# EAGLE board Orbiter_ENCODER_V4_0 (EAGLE 9.0.1)
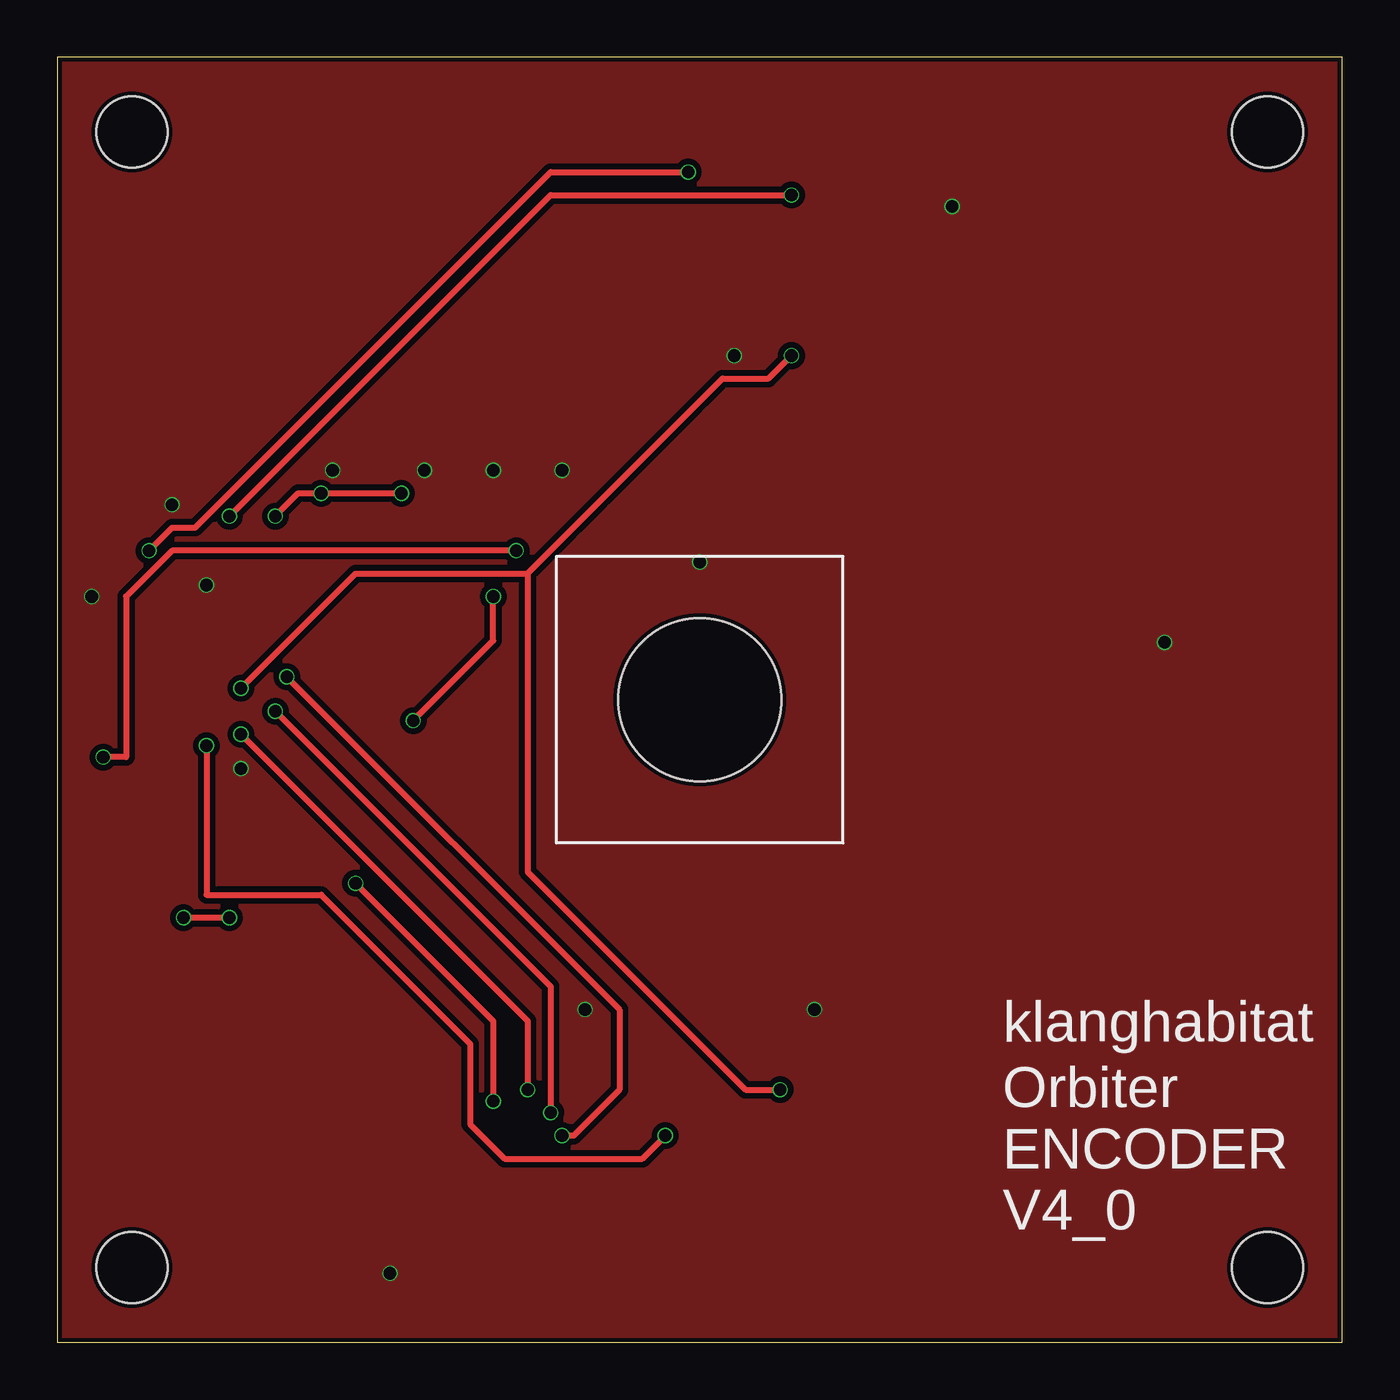
[diagram p0: board, top side]
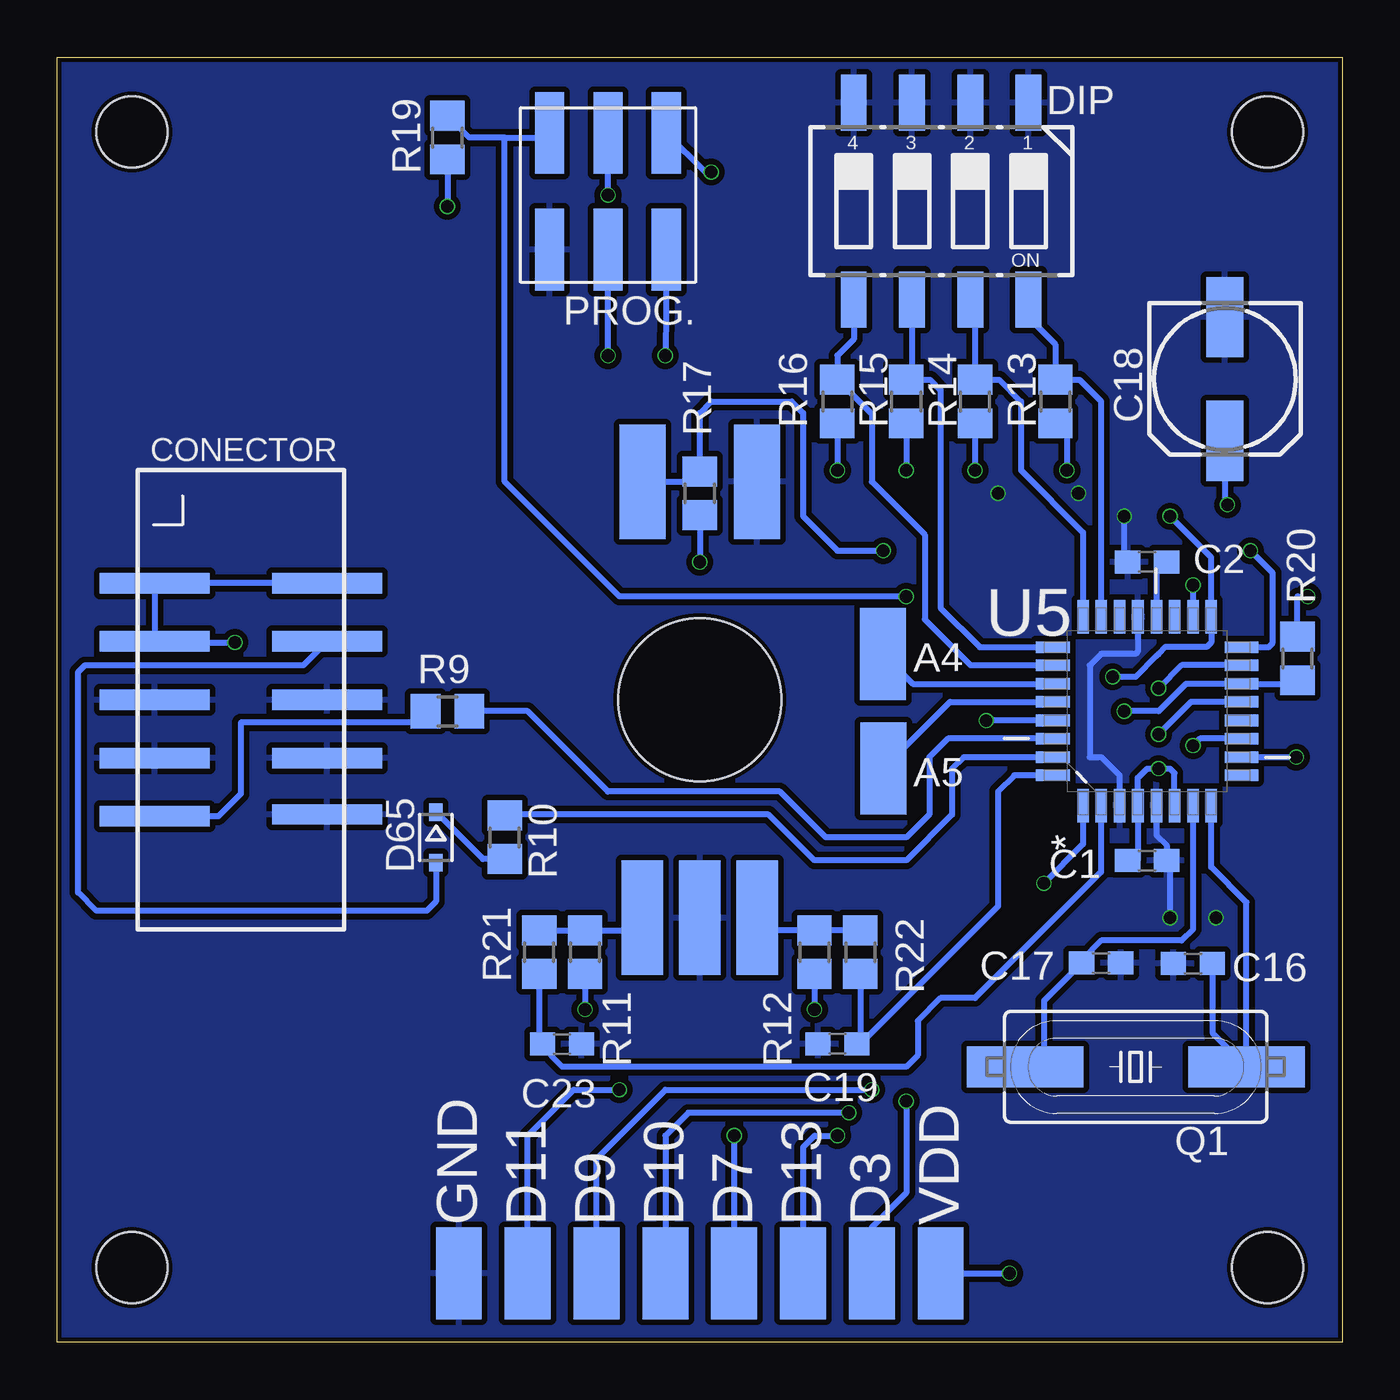
[diagram p1: board, bottom side, seen from below]

Size 56 x 56 mm. Coordinates in mm from the lower left corner, seen from the top.
Outline: 0,0 56,0 56,56 0,56 0,0
Copper layers (1*16): Top 0.035mm / dielectric 1.5mm / Bottom 0.035mm
Design rules "aisler_go_2layer *": minimum track width 0.1mm, minimum drill 0.2mm, track to track 0.25mm, track to pad 0.2mm, pad to pad 0.1mm, via to via 0.1mm, smd to smd 0.1mm, copper to edge 0.2mm, drill to drill 0.21mm, minimum pad ring 0.25mm, minimum via ring 0.05mm, stop-mask expansion 0.01mm, vias tented up to drill 0mil, thermal gap 10mil
Holes 3.1 mm at 3.25,3.25 52.75,52.75 52.75,3.25 3.25,52.75

## Footprints (pad centres in the part's own frame; a part is rotated, then mirrored left to right if it is on the bottom)
OVAL_PAD = smd 2 x 4: P$1 0,0
C0603 = smd 1.1 x 1: 1 -0.85,0; 2 0.85,0
153CLV-0605 = smd 3.5 x 1.6: + 2.7,0; - -2.7,0
87832-10 = smd 0.89 x 4.8: 1 -5.08,-3.759; 2 -5.08,3.757; 3 -2.54,-3.759; 4 -2.54,3.757; 5 0,-3.759; 6 0,3.757; 7 2.54,-3.759; 8 2.54,3.757; 9 5.08,-3.759; 10 5,3.757
SOD323-R = smd 0.762 x 0.6: A 1.1,0; C -1.1,0
CTS-219-04 = smd 1.13 x 2.44: 1 -3.81,-4.3; 2 -1.27,-4.3; 3 1.27,-4.3; 4 3.81,-4.3; 5 3.81,4.3; 6 1.27,4.3; 7 -1.27,4.3; 8 -3.81,4.3
BOURNS_ENCODER_SMD = smd 2 x 5 bottom: S1 -2.5,9.5; S2 2.5,9.5 | smd 1.8 x 5 bottom: TA 2.5,-9.5; TB -2.5,-9.5; VDC 0,-9.5 | hole 7.1: 0,0
6PIN_HEADER_SMD_OPEN = smd 1.27 x 3.56: 1 -2.54,-2.7; 2 -2.54,2.38; 3 0,-2.7; 4 0,2.38; 5 2.54,-2.7; 6 2.54,2.38
SM49 = smd 5.08 x 1.778: 1 -4.826,0; 2 4.826,0
R0805 = smd 1.3 x 1.5: 1 -0.95,0; 2 0.95,0
QFP80P900X900X120-32N = smd 1.473 x 0.508: 1 -4.115,2.794; 2 -4.115,2.007; 3 -4.115,1.194; 4 -4.115,0.406; 5 -4.115,-0.406; 6 -4.115,-1.194; 7 -4.115,-2.007; 8 -4.115,-2.794; 17 4.115,-2.794; 18 4.115,-2.007; 19 4.115,-1.194; 20 4.115,-0.406; 21 4.115,0.406; 22 4.115,1.194; 23 4.115,2.007; 24 4.115,2.794 | smd 0.508 x 1.473: 9 -2.794,-4.115; 10 -2.007,-4.115; 11 -1.194,-4.115; 12 -0.406,-4.115; 13 0.406,-4.115; 14 1.194,-4.115; 15 2.007,-4.115; 16 2.794,-4.115; 25 2.794,4.115; 26 2.007,4.115; 27 1.194,4.115; 28 0.406,4.115; 29 -0.406,4.115; 30 -1.194,4.115; 31 -2.007,4.115; 32 -2.794,4.115

## Placement (x,y rotation side)
A4  TP  [OVAL_PAD]  20.02,30 180 bottom
A5  TP  [OVAL_PAD]  20,25 180 bottom
C1  1uF  [C0603]  8.5,21 180 bottom
C2  100nF  [C0603]  8.5,34.01 0 bottom
C16  22p  [C0603]  6.5,16.5 180 bottom
C17  22p  [C0603]  10.5,16.53 180 bottom
C18  4,7uF/16V  [153CLV-0605]  5.11,41.98 270 bottom
C19  10nF  [C0603]  22,13 0 bottom
C23  10nF  [C0603]  34,13 180 bottom
CONECTOR  10PIN_HEADER_SMD  [87832-10]  48,28 270 bottom
D65  4148  [SOD323-R]  39.5,22 270 bottom
DIP  4PIN_DIP  [CTS-219-04]  17.48,49.73 180 bottom
ENC.  BOURNS_ENCODER  [BOURNS_ENCODER_SMD]  28,28 0 top
PROG.  6PIN_HEADER_SMD_OPEN  [6PIN_HEADER_SMD_OPEN]  32,50 180 bottom
Q1  16MHZ  [SM49]  9,12 0 bottom
R9  1k  [R0805]  38.99,27.49 180 bottom
R10  1k  [R0805]  36.5,22 270 bottom
R11  10k  [R0805]  33,17 90 bottom
R12  10k  [R0805]  23,17 90 bottom
R13  10k  [R0805]  12.5,41 90 bottom
R14  10k  [R0805]  16,41 90 bottom
R15  10k  [R0805]  19,41 90 bottom
R16  10k  [R0805]  22,41 90 bottom
R17  10k  [R0805]  28,37 90 bottom
R19  10k  [R0805]  39,52.5 90 bottom
R20  10k  [R0805]  1.95,29.8 270 bottom
R21  10k  [R0805]  35,17 270 bottom
R22  10k  [R0805]  21,17 270 bottom
U5  ATMEGA328  [QFP80P900X900X120-32N]  8.5,27.5 90 bottom
U$1  TP  [OVAL_PAD]  17.5,3 0 bottom
U$2  TP  [OVAL_PAD]  38.5,3 0 bottom
U$3  TP  [OVAL_PAD]  23.5,3 0 bottom
U$4  TP  [OVAL_PAD]  35.5,3 0 bottom
U$5  TP  [OVAL_PAD]  29.5,3 0 bottom
U$6  TP  [OVAL_PAD]  32.5,3 0 bottom
U$7  TP  [OVAL_PAD]  20.5,3 0 bottom
U$8  TP  [OVAL_PAD]  26.5,3 0 bottom

## Library data of the parts
A4 A5 C1 C2 C16-C19 C23 CONECTOR D65 DIP ENC. PROG. Q1 R9-R17 R19-R22 U$1-U$8 = C_Sager_Bibliothek
U5 = C_Sager_Bibliothek; MPN: ATMEGA328P-AU; OC_FARNELL: 1715486; OC_NEWARK: 14R4631; PACKAGE: TQFP-32; SUPPLIER: Atmel

## Nets
A0: DIP.8 R13.2 U5.23
A1: DIP.7 R14.2 U5.24
A2: DIP.6 R15.2 U5.25
A3: DIP.5 R16.2 U5.26
A4: A4.P$1 U5.27
A5: A5.P$1 U5.28
A6: U5.19
A7: U5.22
D0/RX: R9.1 U5.30
D1/TX: R10.1 U5.31
D2/TB: C19.2 R22.2 U5.32
D3/GSCLK: U5.1 U$7.P$1
D4/TA: C23.2 R21.2 U5.2
D5: U5.9
D6/SWITCH: ENC..S2 R17.2 U5.10
D7/MODE: U5.11 U$8.P$1
D8/WS2812: U5.12
D9/XLAT: U5.13 U$6.P$1
D10/BLANK: R20.2 U5.14 U$5.P$1
D11/MOSI/SIN: PROG..4 U5.15 U$4.P$1
D12/MISO: PROG..1 U5.16
D13/SCK: PROG..3 U5.17 U$3.P$1
GND: C1.1 C2.1 C16.2 C17.1 C18.- C19.1 C23.1 CONECTOR.5 CONECTOR.6 CONECTOR.7 CONECTOR.8 CONECTOR.10 DIP.1 DIP.2 DIP.3 DIP.4 ENC..S1 ENC..VDC PROG..6 U5.3 U5.5 U5.21 U$2.P$1
N$77: D65.C R10.2
N$81: C17.2 Q1.1 U5.7
N$82: C16.1 Q1.2 U5.8
N$90: C2.2 U5.20
RESET: PROG..5 R19.2 U5.29
RX: CONECTOR.9 R9.2
TA: ENC..TA R11.2 R21.1
TB: ENC..TB R12.2 R22.1
TX: CONECTOR.4 D65.A
VDD: C1.2 C18.+ CONECTOR.1 CONECTOR.2 CONECTOR.3 PROG..2 R11.1 R12.1 R13.1 R14.1 R15.1 R16.1 R17.1 R19.1 R20.1 U5.4 U5.6 U5.18 U$1.P$1

## Tracks (layer width: path | path; a pad name or v marks a point on that pad's centre or on a via)
A0
  Bottom 0.254: DIP.8 13.67,44.67 12.5,43.5 R13.2 11.45,41.95 10.51,41.01 U5.23
A1
  Bottom 0.254: DIP.7 16,45.22 R14.2 14.95,41.95 14,41 14,38 11.29,35.29 U5.24
A2
  Bottom 0.254: DIP.6 18.75,42.2 R15.2 17.95,41.95 17.5,41.5 17.5,32 15.79,30.29 U5.25
A3
  Bottom 0.254: DIP.5 21.29,43.71 22,43 R16.2 20.5,40.45 20.5,37.5 18.19,35.19 18.19,31.5 16.2,29.51 U5.26
A4
  Bottom 0.254: A4.P$1 18.71,28.69 U5.27
A5
  Bottom 0.254: A5.P$1 17.09,27.91 U5.28
D0/RX
  Bottom 0.254: U5.30 17.19,26.31 18,25.5 18,23 19,22 22.5,22 24.5,24 32,24 35.5,27.5 R9.1 38.04,27.04
D1/TX
  Bottom 0.254: U5.31 16.51,25.49 17,25 17,23 19,21 23,21 25,23 36.45,23 R10.1
D2/TB
  Bottom 0.254: R22.2 21,13.15 C19.2 21,13 15,19 15,24 14.29,24.71 U5.32
D3/GSCLK  (via drill 0.55)
  Top 0.254: v13,20 19,14 v19,10.5
  Bottom 0.254: U5.1 11.29,21.71 v13,20 | v19,10.5 19,6.5 20.5,5 U$7.P$1
D4/TA
  Bottom 0.254: R21.2 35,13.15 34.92,13.07 | 34.92,13.07 C23.2 | U5.2 10.51,20.49 16,15 17.5,15 18.5,14 18.5,12.5 19,12 34,12 34.92,12.93 34.92,13.07
D6/SWITCH  (via drill 0.55)
  Top 0.254: v20,34.5 5,34.5 3,32.5 3,25.5 v2,25.5
  Bottom 0.254: ENC..S2 28.45,37.5 R17.2 28,40.5 27.5,41 24,41 23.5,40.5 23.5,36 22,34.5 v20,34.5 | v2,25.5 v2.01,25.49 U5.10
D7/MODE  (via drill 0.55)
  Top 0.254: v6.5,26 6.5,19.5 11.5,19.5 18,13 18,9.5 19.5,8 25.5,8 v26.5,9
  Bottom 0.254: U5.11 6.19,26.31 v6.5,26 | v26.5,9 U$8.P$1
D9/XLAT  (via drill 0.55)
  Top 0.254: v8,26.5 20.5,14 v20.5,11
  Bottom 0.254: U5.13 6.59,27.91 v8,26.5 | v20.5,11 29.5,11 32.5,8 U$6.P$1 32.5,2.5
D10/BLANK  (via drill 0.55)
  Top 0.254: v9.5,27.5 21.5,15.5 v21.5,10
  Bottom 0.254: R20.2 1.95,28.69 U5.14 6.81,28.69 8,27.5 v9.5,27.5 | v21.5,10 28.5,10 29.5,9 U$5.P$1
D11/MOSI/SIN  (via drill 0.55)
  Top 0.254: v8,28.5 13,33.5 20.5,33.5 | 20.5,33.5 20.5,20.5 30,11 v31.5,11 | 20.5,33.5 29,42 31,42 v32,43
  Bottom 0.254: U5.15 6.99,29.51 v8,28.5 | v32,43 PROG..4 | U$4.P$1 35.5,9 33.5,11 v31.5,11
D12/MISO  (via drill 0.55)
  Top 0.254: v4,34.5 5,35.5 6,35.5 21.5,51 v27.5,51
  Bottom 0.254: U5.16 3.21,30.29 3.03,30.47 3.03,33.53 v4,34.5 | v27.5,51 27.76,51 PROG..1
D13/SCK  (via drill 0.55)
  Top 0.254: v7.5,36 21.5,50 v32,50 | v10,29 24.5,14.5 24.5,11 22.5,9 v22,9
  Bottom 0.254: v7.5,36 5.71,34.21 U5.17 5.71,30.49 5.9,30.3 7.7,30.3 8,30 8.1,29.9 9,29 v10,29 | v32,50 PROG..3 | U$3.P$1 23.5,8.5 23,9 v22,9
GND  (via drill 0.55)
  Top 0.254: v7.5,18.5 v5.5,18.5 | v9.5,36 10.5,37 v11.5,37 v15,37
  Bottom 0.254: U5.21 8.91,30.09 9,30 10.5,30 11,29.5 11,25.5 10.5,25.5 9.69,24.69 U5.3 | U5.5 8.09,22.09 7.65,21.65 C1.1 7.5,20.85 v7.5,18.5 | C2.1 9.5,34.16 v9.5,36
  pour Bottom: 56,56 56,0 0,0 0,56
N$77
  Bottom 0.254: R10.2 37.45,21.05 D65.C
N$81
  Bottom 0.254: U5.7 6.5,18 7,17.5 10.5,17.5 11.35,16.65 C17.2 13,14.88 13,12 Q1.1
N$82
  Bottom 0.254: U5.8 5.71,20.71 4.17,19.17 Q1.2 5.65,13.48 C16.1
N$90
  Bottom 0.254: C2.2 8.09,33.57 U5.20
RESET  (via drill 0.55)
  Top 0.254: v15.51,27.09 19,30.58 v19,32.5
  Bottom 0.254: U5.29 v15.51,27.09 | v19,32.5 31.5,32.5 36.5,37.5 36.5,52.5 | 36.5,52.5 34.74,52.5 PROG..5 | 36.5,52.5 38.05,52.5 R19.2
RX
  Bottom 0.254: R9.2 40.44,27 48,27 48,23.9 48.98,22.92 CONECTOR.9
TA
  Bottom 0.254: R21.1 R11.2 31.05,17.95 ENC..TA
TB
  Bottom 0.254: R22.1 R12.2 24.95,17.95 ENC..TB
TX
  Bottom 0.254: D65.A 39.5,19.2 39.9,18.8 54.3,18.8 55.1,19.6 55.1,29.2 55,29.3 54.8,29.5 45.28,29.5 CONECTOR.4
VDD  (via drill 0.55)
  Bottom 0.254: U$1.P$1 v14.5,3 | R12.1 v23,14.5 | U5.18 v6.49,33 v6.5,33 | R20.1 1.95,32.5 v1.5,32.5 | C1.2 8.91,21 U5.4 8.91,24.59 8.5,25 v8,25 7.5,25 7.31,24.81 U5.6 | R11.1 v33,14.5 | R13.1 12,39.55 v12,38 | R14.1 v16,38 | R15.1 v19,38 | R16.1 v22,38 | C18.+ 5.11,36.61 v5,36.5 | CONECTOR.2 CONECTOR.1 CONECTOR.3 51.72,30.5 v48.26,30.5 | R17.1 v28,34 | PROG..2 29.46,45.04 v29.5,43 | R19.1 v39,49.5
  pour Top: 56,56 56,0 51.5,0 0,0 0,56

## Text on the board
tNames: klanghabitat | Orbiter / ENCODER / V4_0
bNames: VDD | D3 | D13 | D7 | D10 | D9 | D11 | GND